# Altium PCB 175-00008 rev 1, PCB, M2 Focus Drive.PcbDoc (part 3 of 3)
Units mil, origin at the board's own origin, x right, y up, seen from the top; angles counter-clockwise.
Board outline 6885.96 x 6885.86 mil, 9 copper layers (Top Layer (*.GTL), Mid-Layer 1 (*.G1), +24V (*.GP1), GND (*.GP2), +5V (*.GP3), +12V (*.GP4), -12V (*.GP5), +3.3V (*.GP6), Bottom Layer (*.GBL)), stack 52.6 mil thick; 151 components, 161 nets, 896 pads, 368 vias.
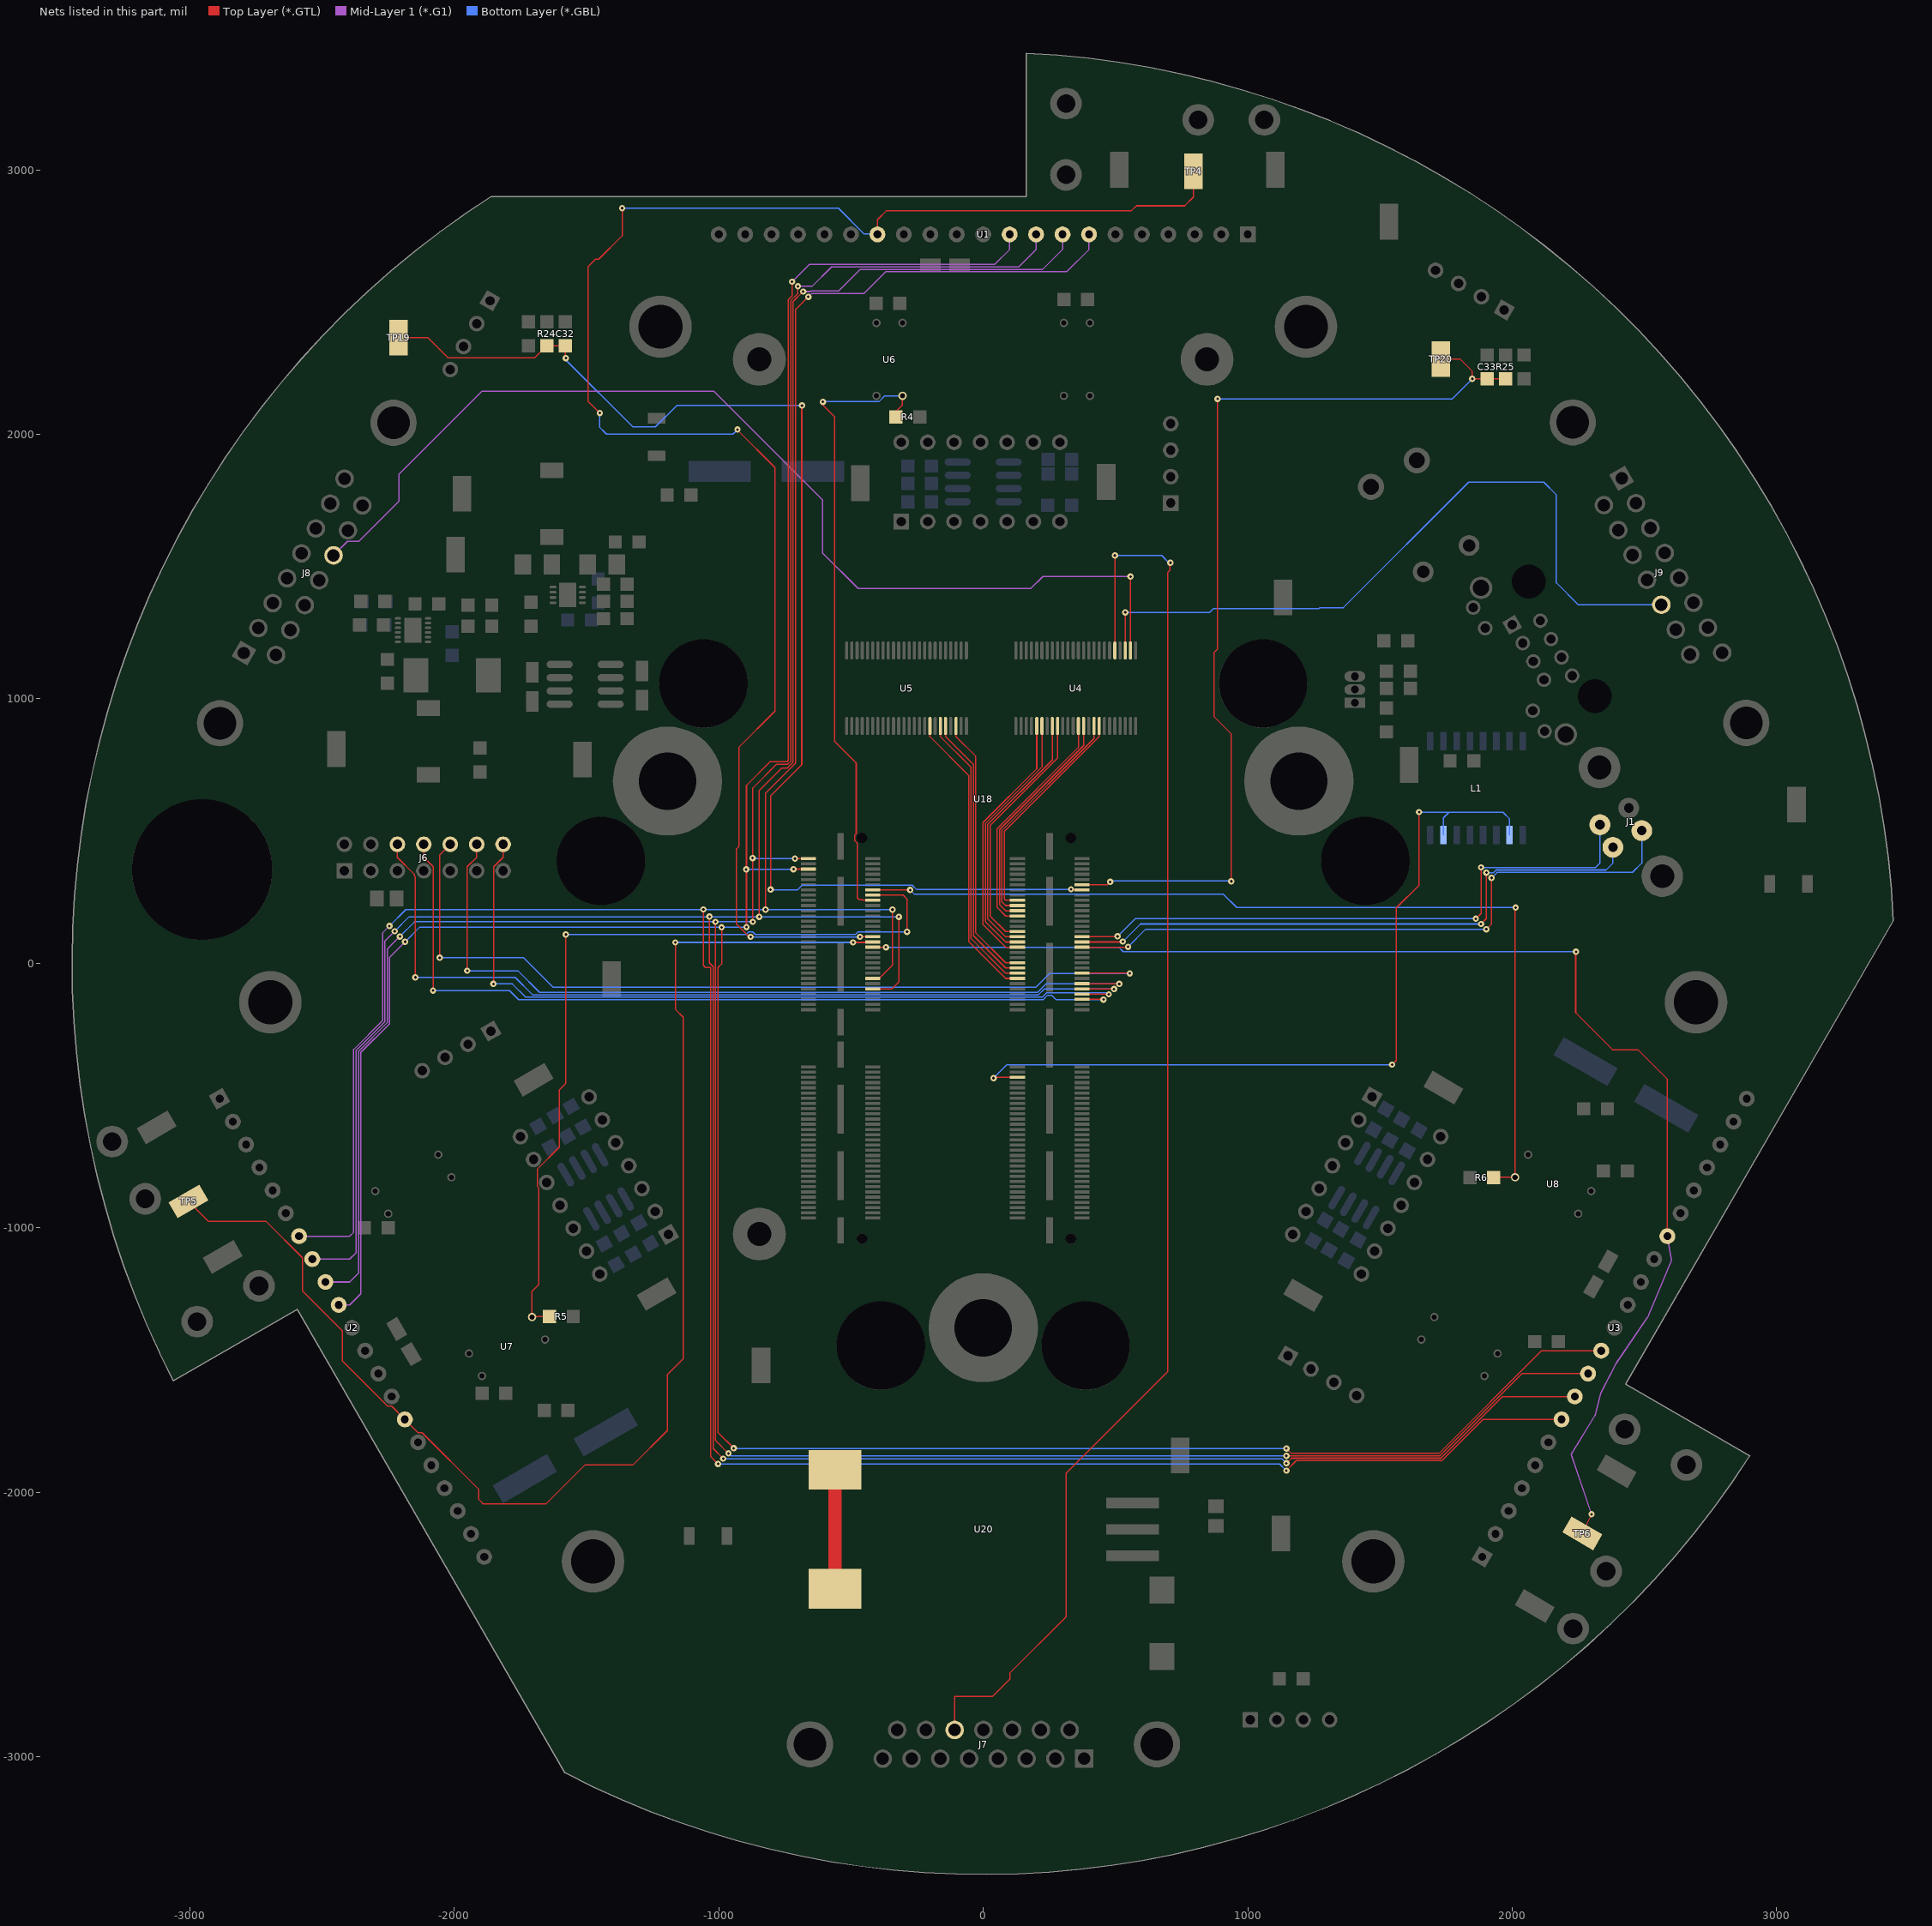
[diagram p10: the nets of this part, all layers, seen from the top]

## Via types
v1: diameter 24, hole 10, Top Layer (*.GTL) to Bottom Layer (*.GBL), 354 vias
v2: diameter 50, hole 25, Top Layer (*.GTL) to Bottom Layer (*.GBL), 10 vias
v3: diameter 25.98, hole 12.99, Top Layer (*.GTL) to Bottom Layer (*.GBL), tented top, 4 vias

## Nets (pads, with @x,y where several pads share a name; then routed paths per layer and width w, separated by ;. In a path a pad name is that pad's centre, name@x,y a point inside that pad or via, vN(x,y) a via of type N, cw(c..) or ccw(c..) an arc to the next point about the centre after c; other vN are vias at no path point) (continued)
POSLIMT1: R4.1 U6.C U18.B17 | length 2397.8
  Top Layer (*.GTL) w5: v1(-605.98,2123) -605.98,2110.52 -561.98,2066.52 -561.98,839.73 -479.98,757.73 -479.98,490.25 -485.22,485.01 -485.22,462.99 -475.98,453.75 -475.98,247 -468.98,240 -455.98,240 -454.16,238.18 U18.B17@-417.3,238.18 ; R4.1@-329.98,2065 -329.98,2086 -305.1,2110.88 U6.C@-305.1,2145.66
  Bottom Layer (*.GBL) w5: v1(-605.98,2123) -605.57,2123.41 -394.31,2123.41 -372.06,2145.66 U6.C@-305.1,2145.66
POSLIMT2: R5.1 U7.C U18.B15 | length 3128.1
  Top Layer (*.GTL) w5: U7.C@-1705.62,-1337.09 -1705.62,-1239.65 -1680.98,-1215 -1680.98,-848.25 -1685.91,-843.32 -1685.91,-778.78 -1602.48,-695.34 -1602.48,-478.84 -1577.98,-454.34 v1(-1577.98,109) ; U7.C@-1703.54,-1335 R5.1@-1639.98,-1335 ; U18.B15@-417.3,257.86 -302.84,257.86 -287.98,243 v1(-287.98,119)
  Bottom Layer (*.GBL) w5: v1(-1577.98,109) -896.14,109 -886.64,118.5 -871.32,118.5 -861.82,109 -483.14,109 -473.64,118.5 -288.48,118.5 v1(-287.98,119)
POSLIMT3: R6.1 U8.C U18.B13 | length 3558.3
  Top Layer (*.GTL) w5: U18.B13@-416.75,277 v1(-275.98,277) ; R6.1@1931.42,-808.61 U8.C@2010.78,-808.61 2010.78,211 v1(2013.02,211)
  Bottom Layer (*.GBL) w5: v1(-275.98,277) -259.98,261 908.75,261 958.75,211 v1(2013.02,211)
QUADA1+: U4.17 U18.A18 | length 854.2
  Top Layer (*.GTL) w5: U18.A18@129.55,238.18 85.02,238.18 80.02,243.18 80.02,498.61 438.6,857.19 U4.17@438.6,897.28
QUADA1-: U4.16 U18.A20 | length 873.2
  Top Layer (*.GTL) w5: U18.A20@129.55,218.49 85.02,218.49 71.02,232.49 71.02,502.33 418.92,850.23 U4.16@418.92,897.28
QUADA2+: U4.9 U18.A30 | length 951.8
  Top Layer (*.GTL) w5: U18.A30@129.55,120.07 85.02,120.07 26.02,179.07 26.02,520.97 281.12,776.08 U4.9@281.12,897.28
QUADA2-: U4.8 U18.A32 | length 970.8
  Top Layer (*.GTL) w5: U18.A32@129.55,100.38 85.02,100.38 17.02,168.38 17.02,524.7 261.44,769.12 U4.8@261.44,897.28
QUADA3+: U5.22 U18.A42 | length 1017.7
  Top Layer (*.GTL) w5: U5.22@-102.97,897.28 -102.97,857.19 -27.98,782.2 -27.98,114.96 85.02,1.96 U18.A42@129.55,1.96
QUADA3-: U5.20 U18.A44 | length 1053.7
  Top Layer (*.GTL) w5: U5.20@-142.34,897.28 -142.34,857.19 -36.98,751.83 -36.98,104.27 85.02,-17.73 U18.A44@129.55,-17.73
QUADB1+: U4.14 U18.A22 | length 884.1
  Top Layer (*.GTL) w5: U18.A22@129.55,198.81 85.02,198.81 62.02,221.81 62.02,506.06 379.55,823.59 U4.14@379.55,897.28
QUADB1-: U4.13 U18.A24 | length 903
  Top Layer (*.GTL) w5: U18.A24@129.55,179.12 85.02,179.12 53.02,211.12 53.02,509.79 359.86,816.63 U4.13@359.86,897.28
QUADB2+: U4.6 U18.A34 | length 981.7
  Top Layer (*.GTL) w5: U18.A34@129.55,80.7 85.02,80.7 8.02,157.7 8.02,528.43 222.07,742.48 U4.6@222.07,897.28
QUADB2-: U4.5 U18.A36 | length 1000.7
  Top Layer (*.GTL) w5: U18.A36@129.55,61.01 85.02,61.01 -0.98,147.01 -0.98,532.16 202.38,735.52 U4.5@202.38,897.28
QUADB3+: U5.19 U18.A46 | length 1081.6
  Top Layer (*.GTL) w5: U5.19@-162.03,897.28 -162.03,857.19 -45.98,741.14 -45.98,93.59 85.02,-37.41 U18.A46@129.55,-37.41
QUADB3-: U5.17 U18.A48 | length 1117.5
  Top Layer (*.GTL) w5: U5.17@-201.4,897.28 -201.4,857.19 -54.98,710.77 -54.98,82.9 85.02,-57.1 U18.A48@129.55,-57.1
STEP1: TP4.1 U1.15 U18.B31 | length 6360.7
  Top Layer (*.GTL) w5: v1(-1449.58,2080.39) -1493.98,2124.79 -1493.98,2347 -1493.98,2634.19 -1465.88,2662.29 -1453.15,2662.29 -1364.98,2750.46 v1(-1364.98,2855) ; v1(-928.98,2018) -928.98,2016.16 -786.98,1874.16 -786.98,1860 -786.98,1671.83 -786.98,953.73 -923.98,816.73 -923.98,441 -932.48,432.5 -932.48,148.33 -884.14,100 v1(-878.98,100) ; v1@-465.6,100.38 U18.B31@-417.3,100.38 ; U1.15@-399.98,2755.89 -399.98,2811 -364.98,2846 561.02,2846 579.02,2864 762.02,2864 795.02,2897 TP4.1@795.02,2995
  Bottom Layer (*.GBL) w5: v1(-1449.58,2080.39) -1449.58,2026.33 -1430.62,2007.36 -1424.25,2001 -945.98,2001 v1(-928.98,2018) ; v1(-1364.98,2855) -547.46,2855 -450.46,2758 -399.98,2758 U1.15@-399.98,2755.89 ; v1(-878.98,100) v1(-465.98,100)
STEP2: TP5.1 U2.15 U18.B33 | length 5191.1
  Top Layer (*.GTL) w5: TP5.1@-3004.98,-900 -2928.98,-976 -2710.98,-976 -2573.98,-1113 -2573.98,-1239 -2423.16,-1389.82 -2423.16,-1502.89 -2251.78,-1674.27 -2236.77,-1674.27 U2.15@-2186.66,-1724.37 -2136.56,-1774.48 -2121.54,-1774.48 -1906.98,-1989.04 -1906.98,-2027 -1890.98,-2043 -1652.16,-2043 -1505.8,-1896.64 -1324.27,-1896.64 -1193.82,-1766.19 -1193.82,-1554.58 -1134.24,-1494.99 -1134.24,-203.85 -1163.98,-174.11 v1(-1163.98,79) ; v1(-491.98,79) -419,79 U18.B33@-417.3,80.7
  Bottom Layer (*.GBL) w5: v1(-1163.98,79) v1(-491.98,79)
STEP3: TP6.1 U3.15 U18.B35 | length 5183.9
  Top Layer (*.GTL) w5: U18.B35@-417.3,61.01 v1(-367.98,61) ; v1@2240.02,44 2240.02,-187.19 2379.16,-326.33 2475.16,-326.33 2586.7,-437.87 U3.15@2586.7,-1031.55 ; TP6.1@2265.02,-2155 v1(2300.02,-2083)
  Mid-Layer 1 (*.G1) w5: v1(2300.02,-2083) 2223.02,-1856 2313.02,-1709 2335.02,-1624 2393.02,-1512 2508.02,-1342 2511.29,-1340 2602.02,-1123 U3.15@2586.7,-1031.55
  Bottom Layer (*.GBL) w5: v1(-367.98,61) 512.02,61 529.12,43.9 2240.92,43.9 v1(2241.02,44)
STEP_RES0: U1.7 U2.7 U3.7 U18.B47 | length 12646.3
  Top Layer (*.GTL) w5: v1(-1057.98,204) -1057.98,103 -1057.98,-7.8 -1049.78,-16 -1029.98,-16 -1029.98,-1865.2 v1(-1002.58,-1892.6) ; v1(-822.98,203) -822.98,244 -822.98,642.81 -709.98,755.81 -709.98,2471 v1(-660.98,2520) ; U18.B47@-417.3,-57.1 -393.35,-57.1 -342.98,-6.73 v1(-342.98,203) ; v1(1146.02,-1918) 1184.02,-1880 1734.02,-1880 1889.65,-1724.37 U3.7@2186.7,-1724.37
  Mid-Layer 1 (*.G1) w5: U2.7@-2586.66,-1031.55 -2394.98,-1031.55 -2379.98,-1016.55 -2379.98,-325.82 -2271.07,-216.91 -2271.07,114.91 v1(-2244.98,141) ; v1(-660.98,2520) -648.48,2532.5 -451.02,2532.5 -368.52,2615 316.02,2615 400.02,2699 U1.7@400.02,2755.89
  Bottom Layer (*.GBL) w5: v1(-2244.98,141) -2182.98,203 v1(-822.98,203) v1(-342.98,203) ; v1(-1002.58,-1892.6) 1120.62,-1892.6 v1(1146.02,-1918)
STEP_RES1: U1.8 U2.8 U3.8 U18.B51 | length 12686.8
  Top Layer (*.GTL) w5: v1(-1034.98,177) -1034.98,102 -1034.98,1.73 -1020.98,-12.27 -1020.98,-1834.6 v1(-982.78,-1872.8) ; v1(-846.98,176) -846.98,229 -846.98,652.75 -761.07,738.66 -739.86,738.66 -718.98,759.54 -718.98,2501.6 v1(-680.78,2539.8) ; U18.B51@-417.3,-96.47 -345.45,-96.47 -318.98,-70 v1(-318.98,176) ; v1(1146.02,-1890) 1165.02,-1871 1730.29,-1871 1963.52,-1637.77 U3.8@2236.7,-1637.77
  Mid-Layer 1 (*.G1) w5: U2.8@-2536.66,-1118.16 -2394.98,-1118.16 -2370.98,-1094.16 -2370.98,-329.55 -2262.07,-220.64 -2262.07,84.31 v1(-2225.18,121.2) ; v1(-680.78,2539.8) -653.91,2539.8 -652.21,2541.5 -547.32,2541.5 -464.82,2624 225.02,2624 300.02,2699 U1.8@300.02,2755.89
  Bottom Layer (*.GBL) w5: v1(-2225.18,121.2) -2170.38,176 v1(-846.98,176) v1(-318.98,176) ; v1(-982.78,-1872.8) 1128.82,-1872.8 v1(1146.02,-1890)
STEP_RES2: U1.9 U2.9 U3.9 U18.B2 | length 12037.3
  Top Layer (*.GTL) w5: v1(-962.98,-1853) -1011.98,-1804 -1011.98,93 ; v1(-871.98,398) v1@-870.98,399 ; v1(-870.98,157) -870.98,158 -870.98,219 v1@-870.98,399 ; v1(-711.98,396) -711.64,395.66 U18.B2@-660.61,395.66 ; v1(-700.58,2559.6) -700.58,2532.73 -727.98,2505.32 -727.98,763.27 -738.25,753 -780.68,753 -870.98,662.7 v1@-870.98,399 ; v1(1146.02,-1862) 1726.57,-1862 2037.4,-1551.17 U3.9@2286.71,-1551.17 ; -1011.98,93 v1(-1011.98,157) -1011.98,93
  Mid-Layer 1 (*.G1) w5: U2.9@-2486.66,-1204.76 -2394.98,-1204.76 -2361.98,-1171.76 -2361.98,-333.27 -2253.07,-224.37 -2253.07,53.71 v1(-2205.38,101.4) ; v1(-700.58,2559.6) -646.84,2559.6 -573.43,2633 134.02,2633 200.02,2699 U1.9@200.02,2755.89
  Bottom Layer (*.GBL) w5: v1(-2205.38,101.4) -2149.88,156.9 ; -2149.98,157 v1(-870.98,157) ; v1(-962.98,-1853) -953.98,-1862 v1(1146.02,-1862) ; v1(-871.98,398) -869.98,396 v1(-711.98,396)
STEP_RES3: U1.10 U2.10 U3.10 U18.B6 | length 12039.4
  Top Layer (*.GTL) w5: v1(-988.98,136) -988.98,85 ; v1@-988.98,137 -988.98,85 ; v1(-943.18,-1833.2) -1002.98,-1773.4 -1002.98,-16 -988.98,-2 -988.98,85 ; v1@-894.98,128 v1(-894.98,137) -894.98,246 -894.98,672.64 -805.62,762 -741.98,762 -736.98,767 -736.98,2509.05 -722.77,2523.26 v1(-722.77,2577) ; v1(-716.98,356) -716.69,356.29 U18.B6@-660.61,356.29 ; v1(1146.02,-1834) 1165.02,-1853 1722.84,-1853 2111.27,-1464.57 U3.10@2336.7,-1464.57
  Mid-Layer 1 (*.G1) w5: U2.10@-2436.66,-1291.36 -2394.98,-1291.36 -2352.98,-1249.36 -2352.98,-337 -2244.07,-228.09 -2244.07,23.11 v1(-2185.58,81.6) ; v1(-722.77,2577) -657.77,2642 43.02,2642 100.02,2699 U1.10@100.02,2755.89
  Bottom Layer (*.GBL) w5: v1(-2185.58,81.6) -2130.18,137 v1(-894.98,137) ; v1(-943.18,-1833.2) -942.38,-1834 v1(1146.02,-1834) ; v1(-895.98,355) -894.98,356 v1(-716.98,356)
SUPPORT: U20.0 | length 450
  Top Layer (*.GTL) w50: U20.0@-559.98,-2365 U20.0@-559.98,-1915
TCK: J6.8 U18.A55 | length 3213.7
  Top Layer (*.GTL) w5: J6.8@-2114.98,450 -2114.98,400.95 -2078.95,364.92 -2078.95,-101.98 v1(-2079.98,-103) ; U18.A55@372.86,-135.84 453.86,-135.84 v1(455.02,-137)
  Bottom Layer (*.GBL) w5: v1(-2079.98,-103) -1790.33,-103 -1756.33,-137 226.86,-137 243.36,-120.5 258.68,-120.5 275.18,-137 v1(455.02,-137)
TDI: J6.12 U18.A49 | length 3147.6
  Top Layer (*.GTL) w5: v1(-1950.98,-28) -1951.01,364.92 -1914.98,400.95 J6.12@-1914.98,450 ; U18.A49@372.86,-76.78 513.6,-76.78 v1(514.42,-77.61)
  Bottom Layer (*.GBL) w5: v1(-1950.98,-28) -1759.26,-28 -1677.26,-110 205.29,-110 237.69,-77.61 v1(514.42,-77.61)
TDO: J6.14 U18.A53 | length 3002.4
  Top Layer (*.GTL) w5: v1(-1851.98,-78) -1851.01,-77.03 -1851.01,364.92 -1814.98,400.95 J6.14@-1814.98,450 ; U18.A53@372.86,-116.15 473.77,-116.15 v1(474.82,-117.2)
  Bottom Layer (*.GBL) w5: v1(-1851.98,-78) -1779.97,-78 -1729.97,-128 223.13,-128 239.63,-111.5 469.12,-111.5 v1(474.82,-117.2)
TMS: J6.6 U18.A51 | length 3331.2
  Top Layer (*.GTL) w5: J6.6@-2214.98,450 -2214.98,400.95 -2151.01,336.98 -2151.01,331.05 -2146.98,327.02 v1(-2146.98,-53) ; U18.A51@372.86,-96.47 493.68,-96.47 v1(494.62,-97.4)
  Bottom Layer (*.GBL) w5: v1(-2146.98,-53) -1769.62,-53 -1703.62,-119 209.02,-119 230.62,-97.4 v1(494.62,-97.4)
TRST: J6.10 U18.A45 | length 3303.7
  Top Layer (*.GTL) w5: v1(-2054.98,21) -2054.98,410 J6.10@-2014.98,450 ; U18.A45@372.86,-37.41 553.42,-37.41 v1(554.02,-38.01)
  Bottom Layer (*.GBL) w5: v1(-2054.98,21) v1@-2043.98,21 ; v1@-2043.98,22 -1738.55,22 -1626.74,-89.82 200.02,-89.82 251.83,-38.01 v1(554.02,-38.01)
TRUSS_TEMP1: C32.2 R24.1 TP19.1 U18.A13 | length 4839
  Top Layer (*.GTL) w5: TP19.1@-2209.98,2365 -2098.98,2365 -2022.98,2289 -1695.98,2289 R24.1@-1649.98,2335 C32.2@-1579.98,2335 -1579.98,2290 v1(-1577.98,2288) ; v1(-803.98,279) -803.98,632.82 -685.98,750.82 -685.98,2108 v1(-684.98,2109) ; v1(332.02,280) 332.02,278.1 332.57,277.55 U18.A13@372.86,277.55
  Bottom Layer (*.GBL) w5: v1(-1577.98,2288) -1577.98,2281 -1324.98,2028 -1239.63,2028 -1158.63,2109 v1(-684.98,2109) ; v1(-803.98,279) -802.98,278 -701.82,278 -684.32,295.5 -268.32,295.5 -252.82,280 v1(332.02,280)
TRUSS_TEMP2: C33.2 R25.1 TP20.1 U18.A11 | length 3715.4
  Top Layer (*.GTL) w5: U18.A11@372.86,297.23 469.26,297.23 v1(480.02,308) ; v1(886.02,2134) 886.02,1188 872.02,1174 872.02,933 938.02,867 v1(938.02,310) ; TP20.1@1730.02,2285 1802.02,2285 1849.02,2238 v1(1849.02,2210) C33.2@1905.02,2210 R25.1@1975.02,2210
  Bottom Layer (*.GBL) w5: v1(480.02,308) 483.02,311 937.02,311 v1(938.02,310) ; v1(886.02,2134) 1773.02,2134 v1(1849.02,2210)
USB_D+: J1.3 U18.A35 | length 2473.4
  Top Layer (*.GTL) w5: U18.A35@372.86,61.01 546.23,61.01 v1(547.62,62.4) ; v1(1902.02,129) 1922.02,149 v1(1922.02,323)
  Bottom Layer (*.GBL) w5: v1(547.62,62.4) 614.22,129 v1(1902.02,129) ; v1(1922.02,323) 1943.02,344 2454.84,344 2489.84,379 J1.3@2489.84,501.77
USB_D-: J1.2 U18.A33 | length 2293.1
  Top Layer (*.GTL) w5: U18.A33@372.86,80.7 526.32,80.7 v1(527.82,82.2) ; v1(1882.22,148.8) 1902.22,168.8 v1(1902.22,342.8)
  Bottom Layer (*.GBL) w5: v1(527.82,82.2) 594.42,148.8 v1(1882.22,148.8) ; v1(1902.22,342.8) 1929.09,342.8 1939.29,353 2354.73,353 2380.73,379 J1.2@2380.73,438.78
USB_VBUS: J1.1 U18.A31 | length 2321.6
  Top Layer (*.GTL) w5: U18.A31@372.86,100.38 506.4,100.38 v1(508.02,102) ; v1(1862.42,168.6) 1882.42,188.6 v1(1882.42,362.6)
  Bottom Layer (*.GBL) w5: v1(508.02,102) 574.62,168.6 1532.26,168.6 1532.36,168.5 1862.33,168.5 v1(1862.42,168.6) ; v1(1882.42,362.6) 1883.02,362 2314.52,362 2331.52,379 J1.1@2331.52,524.02
VA25: L1.10 L1.15 U18.A66 | length 3125.6
  Top Layer (*.GTL) w5: v1(39.02,-434) 41.91,-431.11 U18.A66@129.55,-431.11 ; v1(1546.02,-383) 1561.52,-367.5 1561.52,209.23 1648.02,295.73 v1(1648.02,572)
  Bottom Layer (*.GBL) w5: v1(39.02,-434) 90.02,-383 v1(1546.02,-383) ; v1(1648.02,572) 1649.02,571 1761.02,571 ; L1.15@1740.02,485 1740.02,550 1761.02,571 ; L1.10@1990.02,485 1990.02,546 1965.02,571 1761.02,571
~1FAULT: J7.13 U4.29 | length 5415.8
  Top Layer (*.GTL) w5: J7.13@-107.83,-2898.41 -107.83,-2771 36.61,-2771 100.61,-2707 100.61,-2683.09 314.02,-2469.68 314.02,-1927.09 698.02,-1543.09 698.02,1478.83 706.32,1487.13 706.32,1513.3 v1(707.62,1514.6) ; U4.29@497.66,1182.71 497.66,1541.63 v1(498.02,1542)
  Bottom Layer (*.GBL) w5: v1(498.02,1542) 674.56,1542 701.96,1514.6 v1(707.62,1514.6)
~2FAULT: J9.13 U4.27 | length 2762.7
  Top Layer (*.GTL) w5: U4.27@537.03,1182.71 v1(537.02,1327)
  Bottom Layer (*.GBL) w5: v1(537.02,1327) 538.02,1326 855.02,1326 870.02,1341 1268.57,1341 1272.57,1345 1361.57,1345 1835.57,1819 2119.48,1819 2167.02,1771.45 2167.02,1438.78 2250.02,1355.78 J9.13@2564.03,1355.78
~3FAULT: J8.13 U4.26 | length 4055.6
  Top Layer (*.GTL) w5: U4.26@556.71,1182.71 557.02,1183.02 v1(557.02,1462)
  Mid-Layer 1 (*.G1) w5: J8.13@-2456.14,1542.59 -2403.48,1595.24 -2360.74,1595.24 -2208.98,1747.01 -2208.98,1849 -1894.98,2163 -1017.98,2163 -606.98,1752 -606.98,1550.87 -473.11,1417 180.02,1417 226.02,1463 556.02,1463 v1(557.02,1462)
pads on no net: J2.0 J3.0 J4.0 J5.4 J5.5 J5.7 J5.8 J5.MH1 J5.MH2 J6.3 J7.5 J7.6 J7.8 J7.15 J8.5 J8.6 J8.8 J8.15 J9.5 J9.6 J9.8 J9.15 L1.3 L1.4 L1.5 L1.7 L1.12 L1.13 P1.4 P3.3 P3.4 P7.3 P7.4 U1.3 U1.4 U1.6 U1.17 U2.3 U2.4 U2.6 U2.17 U3.3 U3.4 U3.6 U3.17 U4.19 U4.30 U5.2 U5.3 U5.5 U5.6 U5.8 U5.9 U5.11 U5.12 U5.13 U5.23 U5.26 U5.36 U5.37 U5.38 U5.40 U5.41 U5.43 U5.44 U5.46 U5.47 U12.2 U12.3 U12.5 U12.6 U12.10 U12.12 U12.13 U13.2 U13.3 U13.5 U13.6 U13.10 U13.12 U13.13 U14.1 U14.5 U14.8 U15.1 U15.5 U15.8 U16.2 U16.3 U16.5 U16.6 U16.10 U16.12 U16.13 U17.1 U17.5 U17.8 U18.0 U18.1 U18.A8 U18.A10 U18.A12 U18.A14 U18.A16 U18.A37 U18.A39 U18.A41 U18.A43 U18.A54 U18.A56 U18.A57 U18.A58 U18.A59 U18.A60 U18.A61 U18.A62 U18.A63 U18.A64 U18.A65 U18.A67 U18.A69 U18.A72 U18.A74 U18.A76 U18.A78 U18.A80 U18.A82 U18.A84 U18.A86 U18.A88 U18.A89 U18.A90 U18.A91 U18.A92 U18.A93 U18.A94 U18.A95 U18.A96 U18.A97 U18.A98 U18.A99 U18.A100 U18.A101 U18.A102 U18.A104 U18.A106 U18.A107 U18.A108 U18.A109 U18.A110 U18.A111 U18.A112 U18.A113 U18.A114 U18.A115 U18.A116 U18.A117 U18.A118 U18.A119 U18.A120 U18.B1 U18.B3 U18.B5 U18.B7 U18.B9 U18.B11 U18.B14 U18.B16 U18.B18 U18.B20 U18.B21 U18.B22 U18.B24 U18.B26 U18.B28 U18.B30 U18.B32 U18.B34 U18.B36 U18.B37 U18.B38 U18.B40 U18.B42 U18.B44 U18.B45 U18.B46 U18.B48 U18.B50 U18.B52 U18.B54 U18.B56 U18.B58 U18.B59 U18.B60 U18.B61 U18.B62 U18.B63 U18.B64 U18.B66 U18.B68 U18.B70 U18.B71 U18.B72 U18.B73 U18.B74 U18.B75 U18.B76 U18.B77 U18.B78 U18.B79 U18.B80 U18.B81 U18.B82 U18.B83 U18.B84 U18.B85 U18.B86 U18.B87 U18.B88 U18.B89 U18.B90 U18.B91 U18.B92 U18.B93 U18.B94 U18.B95 U18.B96 U18.B97 U18.B98 U18.B99 U18.B100 U18.B101 U18.B102 U18.B103 U18.B104 U18.B105 U18.B106 U18.B107 U18.B108 U18.B109 U18.B110 U18.B111 U18.B112 U18.B113 U18.B114 U18.B115 U18.B116 U18.B117 U18.B118 U18.B119 U18.B120 U19.1 U21.3 U21.11 U22.1 U22.6 U22.7 U23.4 U23.7

## Polygon pours and split planes (outlines as drawn)
NetD1_1 on Top Layer (*.GTL) "Bottom Layer-AGND" (solid, pour order 1000): -2112.98,1219 -2112.98,1194 -2202.98,1194 -2202.98,1009 -2067.98,1009 -2067.98,1219 -2112.98,1219
+24V on Top Layer (*.GTL) "Bottom Layer-AGND" (solid, pour order 1001): -2112.98,1299 -2112.98,1394 -1997.98,1394 -1997.98,1299 -2112.98,1299
GND on Top Layer (*.GTL) "Bottom Layer-AGND" (solid, pour order 1002): -2187.98,1299 -2112.98,1299 -2112.98,1394 -2187.98,1394 -2187.98,1299
+3.3V on Top Layer (*.GTL) "Bottom Layer-AGND" (solid, pour order 1003): -2292.98,914 -2292.98,674 -1792.98,674 -1792.98,914 -2292.98,914
+3.3V on Top Layer (*.GTL) "Bottom Layer-AGND" (solid, pour order 1004): -2292.98,674 -2342.98,674 -2342.98,1238 -2205.98,1238 -2204.98,1239 -2205.98,1238 -2205.98,1228 -2292.98,1228 -2292.98,674
NetC11_1 on Top Layer (*.GTL) "Bottom Layer-AGND" (solid, pour order 1005): -2098.81,1119 -2292.98,1119 -2292.98,914 -1792.98,914 -1792.98,1234 -1797.98,1239 -2098.81,1237.93
GND on Top Layer (*.GTL) "Bottom Layer-AGND" (solid, pour order 1006): -1540.98,1419.96 -1447.98,1419.96 -1447.98,1557.04 -1448.98,1558 -1674.98,1558 -1674.98,1464.05 -1602.98,1464.05 -1602.98,1419 -1541.98,1419 -1540.98,1419.96
NetL3_1 on Top Layer (*.GTL) "Bottom Layer-AGND" (solid, pour order 1007): -1612.98,1422 -1612.98,1562 -1609.98,1565 -1569.98,1565 -1569.98,1650 -1714.98,1650 -1714.98,1418 -1616.98,1418 -1612.98,1422
+24V on Top Layer (*.GTL) "Bottom Layer-AGND" (solid, pour order 1008): -1614.98,1396 -1614.98,1410 -1614.98,1434 -1615.98,1435 -1703.98,1435 -1703.98,1569 -1817.98,1569 -1817.98,1395 -1816.98,1396 -1614.98,1396
+12V on Top Layer (*.GTL) "Bottom Layer-AGND" (solid, pour order 1009): -1317.98,1403.54 -1317.98,1910 -1716.98,1910 -1714.9,1907.73 -1714.9,1399 -1322.15,1399 -1317.98,1403.54
NetF1_1 on Top Layer (*.GTL) "Bottom Layer-AGND" (solid, pour order 1010): 1667.02,1370 1829.02,1370 1829.02,2010 1481.02,2010 1481.02,1370 1482.02,1369 1483.02,1370 1667.02,1370
+24V on +24V (*.GP1) (split plane): 161 vertices, not listed, extent -3424.73,-3424.77 3420.7,3419.55
GND on GND (*.GP2) (split plane): 161 vertices, not listed, extent -3424.73,-3424.77 3420.7,3419.55
+5V on +5V (*.GP3) (split plane): 161 vertices, not listed, extent -3424.73,-3424.77 3420.7,3419.55
+12V on +12V (*.GP4) (split plane): 161 vertices, not listed, extent -3424.73,-3424.77 3420.7,3419.55
-12V on -12V (*.GP5) (split plane): 161 vertices, not listed, extent -3424.73,-3424.77 3420.7,3419.55
+3.3V on +3.3V (*.GP6) (split plane): 161 vertices, not listed, extent -3424.73,-3424.77 3420.7,3419.55

## Other copper
Top Layer (*.GTL):
  text "*.GTL - TOP LAYER GERBER DATA" at -2209.99,-4755 h80
Mid-Layer 1 (*.G1):
  text "*.G1 - MID LAYER 1 GERBER DATA" at -2209.99,-4755 h80
Bottom Layer (*.GBL):
  text "PCB, M2 Focus Drive" at 375,-2375 h50
  text "175-00008 Rev 1" at 1215,-2375 h50
  text "C 2010, Las Cumbres Observatory Global Telescope" at 1210,-2490 h50
  text "*.GBL - BOTTOM LAYER GERBER DATA" at -2209.99,-4755 h80
+24V (*.GP1) (plane layer: these items are gaps in the copper):
  text "*.GP1 - INTERNAL PLANE LAYER 1 GERBER DATA" at -2209.99,-4755 h80
GND (*.GP2) (plane layer: these items are gaps in the copper):
  text "*.GP2 - INTERNAL PLANE LAYER 2 GERBER DATA" at -2209.99,-4755 h80
+5V (*.GP3) (plane layer: these items are gaps in the copper):
  text "*.GP3 - INTERNAL PLANE LAYER 3 GERBER DATA" at -2209.99,-4755 h80
+12V (*.GP4) (plane layer: these items are gaps in the copper):
  text "*.GP4- INTERNAL PLANE LAYER 4 GERBER DATA" at -2209.99,-4755 h80
-12V (*.GP5) (plane layer: these items are gaps in the copper):
  text "*.GP5- INTERNAL PLANE LAYER 5 GERBER DATA" at -2209.99,-4755 h80
+3.3V (*.GP6) (plane layer: these items are gaps in the copper):
  text "*.GP6- INTERNAL PLANE LAYER 6 GERBER DATA" at -2209.99,-4755 h80

## Silkscreen, mask and mechanical layers (free items; w line width, h text height)
Top Overlay:
  rectangle: 1820,-40 2015,110
  lines w10: -984.23,2401.56 -438.98,2402 ; 443.02,2401 984.27,2401.56
  text "+24V" at 1450.02,2897 h40
  text "1" at 824.02,2455 h196.85
  text "GND" at -1990.98,1867 h40
  text "+12V" at -2024.98,1634 h40
  text "GND" at 1200.02,1384 h40
  text "+3.3V" at -2566.98,909 h40
  text "-12V" at -1583.98,680 h40 r90
  text "GND" at 3158.02,578 h40
  text "TDI" at -1894.98,539 h40 r90
  text "TCK" at -2097.98,536 h40 r90
  text "EMU" at -2393.98,535 h40 r90
  text "GND" at -2289.98,535 h40 r90
  text "TMS" at -2192.98,532 h40 r90
  text "TDO" at -1793.98,529 h40 r90
  text "TRST" at -1994.98,520 h40 r90
  text "780-00012 Rev:" at 1250,20 h40
  text "SCH, M2 Focus Drive" at 1255,-100 h40
  text "GND" at -1456.98,-203 h40
  text "3" at 1836.02,-447 h196.85
  text "2" at -1461.98,-1514 h196.85
  text "GND" at -892.98,-1669 h40
  text "+5V" at 677.02,-1744 h40
  text "GND" at 1081.02,-2299 h40
  text "FAN" at 1399.02,-2891 h50
  text "*.GTO - TOP OVERLAY GERBER DATA" at -2199.99,-4755 h80
Bottom Overlay:
  text "*GBO - BOTTOM OVERLAY GERBER DATA" at -2199.99,-4755 h80
Top Paste:
  text "*.GTP - TOP-SIDE SOLDER PASTE MASK" at -2200,-4754.99 h80
Bottom Paste:
  text "*.GBP - BOTTOM-SIDE SOLDER PASTE MASK" at -2200,-4754.99 h80
Top Solder:
  text "*.GTS - TOP SOLDER MASK GERBER DATA" at -2199.99,-4755 h80
Bottom Solder:
  text "*.GBS - BOTTOM SOLDER MASK GERBER DATA" at -2199.99,-4755 h80
Mechanical 2:
  drawing of 156 lines, arcs and shapes, not listed
  text "NOTES (UNLESS OTHERWISE SPECIFIED):" at -13934.13,4165.16 h90
  text "GENERAL" at -13834.13,3965.16 h90
  text "1)" at -13734.13,3765.11 h75
  text "PCB IS 12-LAYER, .062\" THICK." at -13534.13,3765.13 h75
  text "2)" at -13734.13,3615.11 h75
  text "CONSTRUCTION IS SOLDER-MASK-OVER-BARE-COPPER (SMOBC)." at -13534.13,3615.11 h75
  text "3)" at -13734.13,3465.11 h75
  text "ACCEPTABILITY SHALL BE BASED ON IPC-A-600, CLASS 2." at -13534.13,3465.11 h75
  text "4)" at -13734.13,3315.11 h75
  text "THE FOLLOWING GERBER RS274X PHOTO TOOL FILES SHALL BE USED TO DEFINE ALL CIRCUIT FEATURES:" at -13534.13,3315.11 h75
  text "*.GTL - TOP LAYER GERBER DATA" at -13555,3075 h80
  text "*.G1 - MID LAYER 1 GERBER DATA" at -13555,2922.86 h80
  text "*.GP1 - INTERNAL PLANE LAYER 1 GERBER DATA" at -13555,2770.71 h80
  text "*.GP2 - INTERNAL PLANE LAYER 2 GERBER DATA" at -13555,2618.57 h80
  text "*.GP3 - INTERNAL PLANE LAYER 3 GERBER DATA" at -13555,2466.43 h80
  text "*.GP4- INTERNAL PLANE LAYER 4 GERBER DATA" at -13555,2314.29 h80
  text "*.GP5- INTERNAL PLANE LAYER 5 GERBER DATA" at -13555,2162.14 h80
  text "*.GP6- INTERNAL PLANE LAYER 6 GERBER DATA" at -13555,2010 h80
  text "*.GBL - BOTTOM LAYER GERBER DATA" at -13555,1857.86 h80
  text "*.GTO - TOP OVERLAY GERBER DATA" at -13555,1705.71 h80
  text "*GBO - BOTTOM OVERLAY GERBER DATA" at -13555,1553.57 h80
  text "*.GTP - TOP-SIDE SOLDER PASTE MASK" at -13555.01,1401.42 h80
  text "*.GBP - BOTTOM-SIDE SOLDER PASTE MASK" at -13555.01,1249.28 h80
  text "*.GTS - TOP SOLDER MASK GERBER DATA" at -13555,1097.14 h80
  text "*.GBS - BOTTOM SOLDER MASK GERBER DATA" at -13555,945 h80
  text "5)" at -13796.13,49.39 h75
  text "THE PHOTO TOOL SHALL NOT BE COMPENSATED WITHOUT PRIOR ENGINEERING APPROVAL." at -13596.13,49.39 h75
  text "PCB DESIGNER: RICH LOBDILL   PH (805) 880-1621  FAX (805) 961-1792." at -13596.13,-100.56 h75
  text "FABRICATION TOLERANCES" at -13776.13,-392.84 h90
  text "6)" at -13676.13,-592.89 h75
  text "END PRODUCT CONDUCTOR WIDTHS AND PAD DIAMETERS SHALL NOT VARY MORE THAN" at -13476.13,-592.89 h75
  text "0.002\" FROM THE 1:1 DIMENSIONS OF THE MASTER ARTWORK." at -13476.13,-742.84 h75
  text "7)" at -13676.13,-892.89 h75
  text "THE CONDUCTIVE PATTERN SHALL BE POSITIONED SO THAT THE LOCATION OF ANY PAD OR" at -13476.13,-892.89 h75
  text "LAND SHALL BE WITHIN 0.005\" DIAMETER TO THE TRUE POSITION OF THE HOLE IT CIRCUMSCRIBES." at -13476.13,-1042.84 h75
  text "8.1)" at -13701.13,-1173.84 h75
  text "DRILL TOLERANCES +/- 0.003\"" at -13474.13,-1181.84 h75
  text "8.2)" at -13713.13,-1317.84 h75
  text "ALL DRILL HOLE SIZES AND TOLERANCES APPLY AFTER PLATING." at -13476.13,-1324.89 h75
  text "9)" at -13676.13,-1474.89 h75
  text "THE MINIMUM ANNULAR RING SHALL BE 0.005\"." at -13476.13,-1474.89 h75
  text "10)" at -13731.13,-1624.89 h75
  text "BOW AND TWIST SHALL NOT EXCEED 0.010\" PER INCH." at -13476.13,-1624.89 h75
  text "11)" at -13721.13,-1774.89 h75
  text "FOR PCB ROUTING DIMENSIONS: .XXX = +/-.005\"  .XX = +/-.020\"" at -13476.13,-1774.89 h75
  text "MATERIAL" at -13776.13,-1974.84 h90
  text "12)" at -13731.13,-2174.89 h75
  text "BASE MATERIAL IS FR4 EPOXY FIBERGLASS" at -13469.13,-2180.84 h75
  text "SEE STACK-UP LEGEND FOR COPPER CLADDING CALL OUTS" at -13469.13,-2320.84 h75
  text "13)" at -13731.13,-2324.89 h75
  text "PLATING" at -13776.13,-2524.84 h90
  text "14)" at -13731.13,-2719.89 h75
  text "ALL HOLES AND CONDUCTIVE SURFACES SHALL BE PLATED WITH A MINIMUM OF 0.001\" COPPER." at -13476.13,-2719.89 h75
  text "15)" at -13731.13,-2869.89 h75
  text "AFTER SOLDERMASK, ALL EXPOSED HOLES AND CONDUCTIVE SURFACES SHALL BE COATED" at -13476.13,-2869.89 h75
  text "WITH A GOLD IMMERSION PLATING TO PRESERVE SOLDERABILITY." at -13469.13,-3020.84 h75
  text "COATINGS" at -13776.13,-3219.84 h90
  text "16)" at -13726.13,-3414.89 h75
  text "THE SOLDERMASK SHALL BE BLACK LIQUID PHOTO-IMAGEABLE PER IPC-SM-840, TYPE-B, CLASS 2." at -13476.13,-3414.89 h75
  text "17)" at -13731.13,-3564.89 h75
  text "THE SOLDERMASK REGISTRATION ALLOWANCE IS 0.003\".  THERE SHALL BE NO SOLDERMASK ON" at -13476.13,-3564.89 h75
  text "ANY SOLDER PAD OR LAND." at -13476.13,-3714.89 h75
  text "MARKING" at -13776.13,-3914.84 h90
  text "18)" at -13731.13,-4109.89 h75
  text "THE LEGEND SHALL BE SCREEN-PRINTED USING PERMANENT YELLOW EPOXY INK." at -13476.13,-4109.89 h75
  text "19)" at -13731.13,-4259.89 h75
  text "THE SCREEN PRINTING REGISTRATION ALLOWANCE IS 0.007\".  THERE SHALL BE NO INK ON ANY" at -13476.13,-4259.89 h75
  text "SOLDER PAD OR LAND." at -13476.13,-4409.84 h75
  text "20)" at -13741.13,-4559.89 h75
  text "THE VENDOR CODE AND UL FLAMMABILITY RATING MAY BE ETCHED IN THE FOIL OR MARKED IN" at -13476.13,-4559.89 h75
  text "PERMANENT EPOXY INK (VENDOR'S OPTION)." at -13476.13,-4709.84 h75
  text "ELECTRICAL TESTING" at -13776.13,-4909.84 h90
  text "21)" at -13731.13,-5104.89 h75
  text "ALL BOARDS SHALL BE ELECTRICALLY TESTED TO THE SUPPLIED IPC-D-356A NET LIST" at -13476.13,-5104.89 h75
  text "FOR CONTINUITY, OPENS AND SHORTS." at -13476.13,-5254.84 h75
  text "Layer Stack Up Detail for: 175-00008 rev 1, PCB, M2 Focus Drive.PcbDoc" at -13390,-6226.59 h76
  text "Layer" at -13390,-6467.58 h76
  text "Copper cladding" at -11010,-6525 h75
  text "Name" at -13390,-6619.58 h76
  text "Top Layer (*.GTL)" at -13390,-6841.62 h106
  text "1/2 oz. (1 oz. Finished)" at -11250,-6845 h80
  text "1/2 oz" at -11265.13,-7144.84 h80
  text "Mid-Layer 1 (*.G1)" at -13390,-7158.48 h106
  text "+24V (*.GP1)" at -13390,-7475.35 h106
  text "1/2 oz" at -11265.13,-7494.84 h80
  text "GND (*.GP2)" at -13390,-7792.22 h106
  text "1/2 oz" at -11265.13,-7804.84 h80
  text "+5V (*.GP3)" at -13390,-8109.09 h106
  text "1/2 oz" at -11280.13,-8109.84 h80
  text "1/2 oz" at -11230.13,-8399.84 h80
  text "+12V (*.GP4)" at -13390,-8425.96 h106
  text "1/2 oz" at -11220.13,-8664.84 h80
  text "-12V (*.GP5)" at -13390,-8742.83 h106
  text "1/2 oz" at -11215.13,-9029.84 h80
  text "+3.3V (*.GP6)" at -13390,-9059.7 h106
  text "1/2 oz. (1 oz. Finished)" at -11190,-9365 h80
  text "Bottom Layer (*.GBL)" at -13390,-9376.56 h106
  text "Las Cumbres Observatory, Inc." at 4655.87,-9585.84 h90
  text "Las Cumbres Observatory" at 2885.87,-9705.84 h150
  text "PRIMARY PCB SPECIFICATIONS" at -6277.13,-9720.84 h200
  text "6740 Cortona Dr." at 5095.87,-9739.84 h90
  text "Global Telescope Network" at 3045.87,-9865.84 h125
  text "Goleta, CA 93117" at 5045.87,-9889.84 h90
  text "(REFER TO COMPLETE SPEC LISTING AT LEFT FOR FURTHER DETAILS)" at -6624.13,-9925.84 h100
  text "www.lcogt.net" at 5185.87,-10035.84 h90
  text "DATE" at 2710.87,-10146.64 h32
  text "DESIGNED" at 3650.87,-10146.64 h32
  text "DRAWN" at 4730.87,-10146.64 h32
  text "SCALE" at 5810.87,-10146.64 h32
  text "NUMBER OF LAYERS" at -6524.13,-10175.84 h150
  text "9" at -2974.13,-10175.85 h150
  text "Rich Lobdill" at 5035.87,-10245.84 h55
  text "Rich Lobdill" at 3910.87,-10250.84 h55
  text "1 : 1" at 6095.87,-10264.84 h90
  text "6/18/2010" at 2740.87,-10271.84 h90
  text "FINISHED THICKNESS" at -6524.13,-10425.84 h150
  text ".062\"" at -3149.13,-10425.84 h150
  text "CHECKED/DATE" at 2710.87,-10436.64 h32
  text "APPROVED/DATE" at 4730.87,-10436.64 h32
  text "BASE MATERIAL" at -6524.13,-10675.84 h150
  text "FR4" at -3224.13,-10675.84 h150
  text "TITLE" at 2710.87,-10726.64 h32
  text "NOTICE" at -14179.13,-10834.84 h100
  text "175-00008, M2 Focus Drive" at 2930.87,-10870.84 h100
  text "GOLD IMMERSION" at -3718.13,-10892.84 h150
  text "PLATING TYPE" at -6524.13,-10925.84 h150
  text "THIS DRAWING EMBODIES A PROPRIETARY DESIGN OWNED BY LAS CUMBRES" at -14144.13,-10949.84 h60
  text "OBSERVATORY.  IT IS SUBMITTED FOR A SPECIFIC PURPOSE UNDER A CON-" at -14144.13,-11049.84 h60
  text "SIZE" at 2710.87,-11056.64 h32
  text "DOC NO." at 3170.87,-11056.64 h32
  text "REV" at 5250.87,-11056.64 h32
  text "SHEET" at 5710.87,-11056.64 h32
  text "FIDENTIAL RELATIONSHIP, AND EXCEPT FOR PURPOSES EXPRESSLY GRANTED" at -14144.13,-11144.84 h60
  text "OF" at 6140.87,-11159.84 h60
  text "SOLDER MASK COLOR" at -6524.13,-11175.84 h150
  text "BLACK" at -3099.13,-11175.84 h150
  text "1" at 5970.87,-11179.84 h100
  text "20" at 6370.87,-11179.84 h100
  text "1" at 5395.87,-11192.84 h130
  text "-" at 3725.87,-11194.84 h130
  text "GPT" at 4445.59,-11209.63 h130
  text "C" at 2845.87,-11210.84 h100
  text "IN WRITING, ALL RIGHTS ARE RESERVED BY LAS CUMBRES OBSERVATORY." at -14144.13,-11234.84 h60
Mechanical 5:
  text "175-00008 Rev 1, M2 Focus Drive" at -2070.1,-4330.26 h80
  text "LAS CUMBRES OBSERVATORY     6/18/2010" at -2070.1,-4480.27 h80
Mechanical 15:
  circle w10: c0.02,0 r3444.88
Drill Drawing:
  lines w10: -14254.13,-11310.84 -14254.13,4689.16 6745.87,4689.16 6745.87,-11310.84 -14254.13,-11310.84 ; 2690.87,-11204.84 ccw(c2740.87,-11204.84) 2740.87,-11254.84 3070.87,-11254.84 ccw(c3070.87,-11214.84) 3110.87,-11214.84 3110.87,-11044.84 ccw(c3070.87,-11044.84) 3070.87,-11004.84 2690.87,-11004.84 2690.87,-11204.84 ; 2690.87,-10914.84 ccw(c2740.87,-10914.84) 2740.87,-10964.84 6640.87,-10964.84 ccw(c6640.87,-10914.84) 6690.87,-10914.84 6690.87,-10724.84 ccw(c6640.87,-10724.84) 6640.87,-10674.84 2690.87,-10674.84 2690.87,-10914.84 ; 2690.87,-10594.84 ccw(c2730.87,-10594.84) 2730.87,-10634.84 4150.87,-10634.84 ccw(c4150.87,-10584.84) 4200.87,-10584.84 4200.87,-10434.84 ccw(c4150.87,-10434.84) 4150.87,-10384.84 2690.87,-10384.84 2690.87,-10594.84 ; 3150.87,-11214.84 ccw(c3190.87,-11214.84) 3190.87,-11254.84 5150.87,-11254.84 ccw(c5150.87,-11214.84) 5190.87,-11214.84 5190.87,-11044.84 ccw(c5150.87,-11044.84) 5150.87,-11004.84 3150.87,-11004.84 3150.87,-11214.84 ; 4240.87,-10584.84 ccw(c4290.87,-10584.84) 4290.87,-10634.84 5700.87,-10634.84 ccw(c5700.87,-10584.84) 5750.87,-10584.84 5750.87,-10434.84 ccw(c5700.87,-10434.84) 5700.87,-10384.84 4240.87,-10384.84 4240.87,-10584.84 ; 5230.87,-11204.84 ccw(c5280.87,-11204.84) 5280.87,-11254.84 5610.87,-11254.84 ccw(c5610.87,-11214.84) 5650.87,-11214.84 5650.87,-11044.84 ccw(c5610.87,-11044.84) 5610.87,-11004.84 5230.87,-11004.84 5230.87,-11204.84 ; 5690.87,-11214.84 ccw(c5730.87,-11214.84) 5730.87,-11254.84 6640.87,-11254.84 ccw(c6640.87,-11204.84) 6690.87,-11204.84 6690.87,-11054.84 ccw(c6640.87,-11054.84) 6640.87,-11004.84 5690.87,-11004.84 5690.87,-11214.84 ; 5790.87,-10584.84 ccw(c5840.87,-10584.84) 5840.87,-10634.84 6640.87,-10634.84 ccw(c6640.87,-10584.84) 6690.87,-10584.84 6690.87,-10434.84 ccw(c6640.87,-10434.84) 6640.87,-10384.84 5790.87,-10384.84 5790.87,-10584.84
  lines w20: -14229.07,-10679.96 cw(c-14179.13,-10754.84) -14179.13,-10664.84 -13719.13,-10664.84 cw(c-13719.13,-10754.84) -13629.13,-10754.84 -13629.13,-10804.84 ccw(c-13619.13,-10804.84) -13619.13,-10814.84 -10979.13,-10814.84 cw(c-10979.13,-10904.84) -10889.13,-10904.84 -10889.13,-11244.84 cw(c-10979.13,-11244.84) -10904.25,-11294.78 ; 2645.79,-11293.5 cw(c2740.87,-11204.84) 2610.87,-11204.84 2610.87,-10384.84 cw(c2690.87,-10384.84) 2690.87,-10304.84 6640.87,-10304.84 cw(c6640.87,-10434.84) 6729.53,-10339.76 ; -14229.13,-11244.84 ccw(c-14179.13,-11244.84) -14179.13,-11294.84 -10979.13,-11294.84 ccw(c-10979.13,-11244.84) -10929.13,-11244.84 -10929.13,-10904.84 ccw(c-10979.13,-10904.84) -10979.13,-10854.84 -13619.13,-10854.84 cw(c-13619.13,-10804.84) -13669.13,-10804.84 -13669.13,-10754.84 ccw(c-13719.13,-10754.84) -13719.13,-10704.84 -14179.13,-10704.84 ccw(c-14179.13,-10754.84) -14229.13,-10754.84 -14229.13,-11244.84 ; 2650.87,-11204.84 ccw(c2740.87,-11204.84) 2740.87,-11294.84 6640.87,-11294.84 ccw(c6640.87,-11204.84) 6730.87,-11204.84 6730.87,-10434.84 ccw(c6640.87,-10434.84) 6640.87,-10344.84 2690.87,-10344.84 ccw(c2690.87,-10384.84) 2650.87,-10384.84 2650.87,-11204.84
  lines w30: -14754.13,-11810.84 -14754.13,5189.16 7245.87,5189.16 7245.87,-11810.84 -14754.13,-11810.84
  text ".Legend" at -11125,-3260 h100
  text "DESIGNED" at 2710.87,-10436.64 h32
  text "DRAWN" at 4260.87,-10436.64 h32
  text "SCALE" at 5810.87,-10436.64 h32
  text "Rich Lobdill" at 3196.87,-10532.84 h55
  text "Rich Lobdill" at 4757.87,-10534.84 h55
  text "1 : 1" at 6095.87,-10554.84 h90
  text "TITLE" at 2710.87,-10726.64 h32
  text "NOTICE" at -14174.13,-10849.84 h100
  text "175-00008, M2 Focus Drive" at 2927.87,-10870.84 h100
  text "THIS DRAWING EMBODIES A PROPRIETARY DESIGN OWNED BY LAS CUMBRES" at -14139.13,-10964.84 h60
  text "SIZE" at 2710.87,-11056.64 h32
  text "DOC NO." at 3170.87,-11056.64 h32
  text "REV" at 5250.87,-11056.64 h32
  text "SHEET" at 5710.87,-11056.64 h32
  text "OBSERVATORY.  IT IS SUBMITTED FOR A SPECIFIC PURPOSE UNDER A CON-" at -14139.13,-11064.84 h60
  text "FIDENTIAL RELATIONSHIP, AND EXCEPT FOR PURPOSES EXPRESSLY GRANTED" at -14139.13,-11159.84 h60
  text "OF" at 6140.87,-11159.84 h60
  text "2" at 5955.87,-11179.84 h100
  text "20" at 6370.87,-11179.84 h100
  text "-" at 3725.87,-11194.84 h130
  text "1" at 5390.87,-11194.84 h130
  text "C" at 2845.87,-11210.84 h120
  text "GD1" at 4545.87,-11210.84 h120
  text "IN WRITING, ALL RIGHTS ARE RESERVED BY LAS CUMBRES OBSERVATORY." at -14139.13,-11249.84 h60

## Dimensions
0.02,0 to -3090.53,2539.37 on Mechanical 2

## Text inside footprints (layer, text, board x,y; h text height)
J6: Top Overlay "2" at -2534.98,430 h50; Top Overlay "1" at -2534.98,330 h50; Top Overlay "14" at -1734.98,430 h50; Top Overlay "13" at -1734.98,330 h50
P2: Top Overlay "1" at 1672.02,2114 h40 r30
U1: Top Overlay "1" at 989.02,2929 h40
U2: Top Overlay "1" at -3009.98,-662 h40 r30
U3: Top Overlay "1" at 2066.02,-2335 h40 r60
U18: Top Overlay "B1" at -295.25,433.06 h50 r90; Top Overlay "A1" at 492.15,433.06 h50 r90